# EAGLE board Trafo_board (EAGLE 9.6.2)
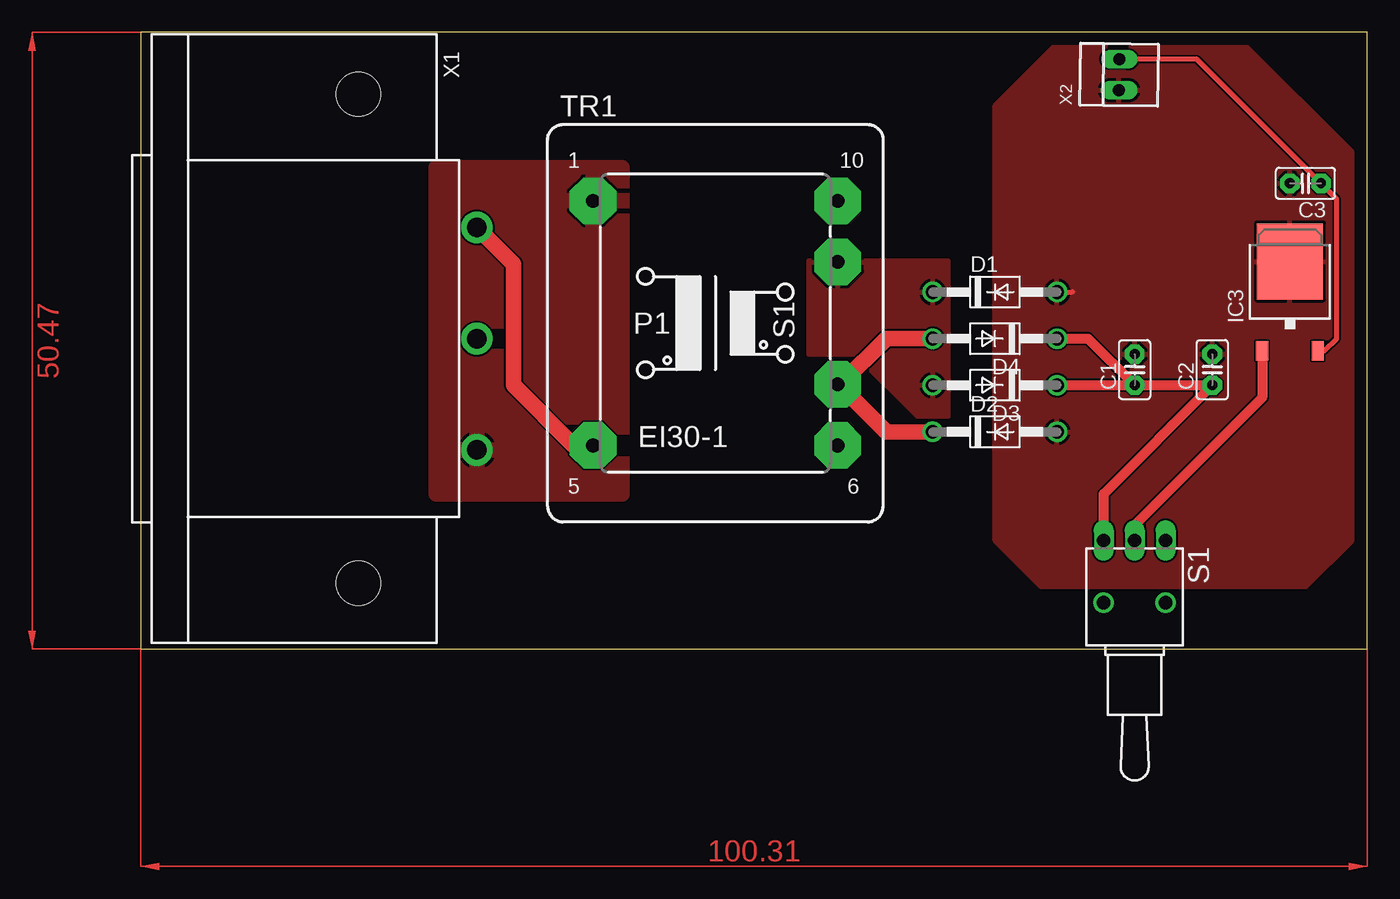
[diagram p0: board, top side]

Size 100.31 x 50.47 mm. Coordinates in mm from the lower left corner, seen from the top.
Outline: 0,0 100.31,0 100.31,50.47 0,50.47 0,0
Copper layers (1*16): Top 0.035mm / dielectric 1.5mm / Bottom 0.035mm
Design rules "default": minimum track width 6mil, minimum drill 0.35mm, track to track 6mil, track to pad 6mil, pad to pad 6mil, via to via 6mil, smd to smd 6mil, copper to edge 40mil, drill to drill 6mil, minimum pad ring 10mil, minimum via ring 8mil, stop-mask expansion 4mil, vias tented up to drill 0mil, thermal gap 10mil

## Footprints (pad centres in the part's own frame; a part is rotated, then mirrored left to right if it is on the bottom)
C2.5-2 = drill 0.813 pad 1.6 octagon: 1 -1.27,0; 2 1.27,0
DO41-10 = drill 1.118: A 5.08,0; C -5.08,0
TO252 = smd 1 x 1.6: 1 -2.28,-4.8; 2 2.28,-4.8 | smd 5.4 x 6.2: 3 0,2.5
TL3XWO = drill 1.1 pad 1.422 long: 1 -2.54,-5.08; 2 0,-5.08; 3 2.54,-5.08 | drill 1.1 pad 1.676: M1 -2.54,0; M2 2.54,0
EI30-1 = drill 1.118 pad 3.81 octagon: 1 -10.008,10.008; 5 -10.008,-10.008; 6 10.008,-10.008; 7 10.008,-5.004; 9 10.008,5.004; 10 10.008,10.008
6ESRM-P = drill 1.6 pad 2.6: 1 -9.1,9.7; 2 0,9.7; 3 9.1,9.7 | hole 3.6: -20,0; 20,0
22-23-2021 = drill 1 long: 1 -1.27,0; 2 1.27,0

## Placement (x,y rotation side)
C1  10uF  [C2.5-2]  81.28,22.86 90 top
C2  10uF  [C2.5-2]  87.63,22.86 90 top
C3  10uF  [C2.5-2]  95.25,38.1 180 top
D1  1N4004  [DO41-10]  69.85,29.21 0 top
D2  1N4004  [DO41-10]  69.85,17.78 0 top
D3  1N4004  [DO41-10]  69.85,21.59 180 top
D4  1N4004  [DO41-10]  69.85,25.4 180 top
IC3  7805DT  [TO252]  93.98,29.21 0 top
S1  TL32WO  [TL3XWO]  81.28,3.81 180 top
TR1  [EI30-1]  46.99,26.67 0 top
X1  6ESRM-P  [6ESRM-P]  17.78,25.4 270 top
X2  22-23-2021  [22-23-2021]  80.01,46.99 89.3 top

## Library data of the parts
C1-C3 = capacitor-wima
D1-D4 = diode
IC3 = linear
S1 = switch
TR1 = trafo
X1 = con-tycoelectronics; MF: TYCO ELECTRONICS; MPN: 6ESRM-P; OC_FARNELL: unknown; OC_NEWARK: 87F1821
X2 = con-molex; MF: MOLEX; MPN: 22-23-2021; OC_FARNELL: 1462926; OC_NEWARK: 25C3832

## Nets
+5V: C3.1 IC3.2 X2.2
GND: C1.2 C2.2 C3.2 D1.A D2.A IC3.3 X2.1
N$47: D1.C D3.A TR1.9
N$48: D2.C D4.A TR1.7
N$49: TR1.1 X1.3
N$52: C1.1 C2.1 D3.C D4.C S1.3
N$59: IC3.1 S1.2
VCC: TR1.5 X1.1

## Tracks (layer width: path | path; a pad name or v marks a point on that pad's centre or on a via)
+5V
  Top 0.406: IC3.2 96.8,24.41 97.79,25.4 97.79,36.83 C3.1 86.36,48.26 X2.2
GND
  Top 0.406: D1.A 76.2,29.21
  pour Top: 73.66,5.08 69.85,8.89 69.85,44.45 73.66,48.26 74.93,49.53 90.17,49.53 99.06,40.64 99.06,8.89 95.25,5.08
N$47
  Top 0.152: 57.04,31.64 57.12,31.55
  Top 0.406: TR1.9 57.04,31.64
  pour Top: 66.04,19.05 66.04,31.75 54.61,31.75 54.61,24.13 58.42,24.13 63.5,19.05
N$48
  Top 0.152: TR1.7 57.15,21.67
  Top 1.27: D4.A 60.96,25.4 57.23,21.67 TR1.7 57.07,21.67 60.96,17.78 D2.C
N$49
  pour Top: 26.67,39.37 39.37,39.37 39.37,12.7 24.13,12.7 24.13,39.37
N$52
  Top 0.813: D3.C C1.1 | D4.C 77.47,25.4 C1.1 | C1.1 C2.1 78.74,12.7 S1.3
N$59
  Top 0.813: S1.2 81.28,10.16 91.7,20.58 IC3.1
VCC
  Top 1.27: X1.1 30.48,31.5 30.48,21.59 35.41,16.66 TR1.5
(copper drawn outside any net)
  shapes: Top area x2